# Altium PCB DAPLink.PcbDoc
Units mm, origin at the board's own origin, x right, y up, seen from the top; angles counter-clockwise.
Board outline 42 x 20 mm, 2 copper layers (Top Layer, Bottom Layer); 40 components, 31 nets, 154 pads, 57 vias.
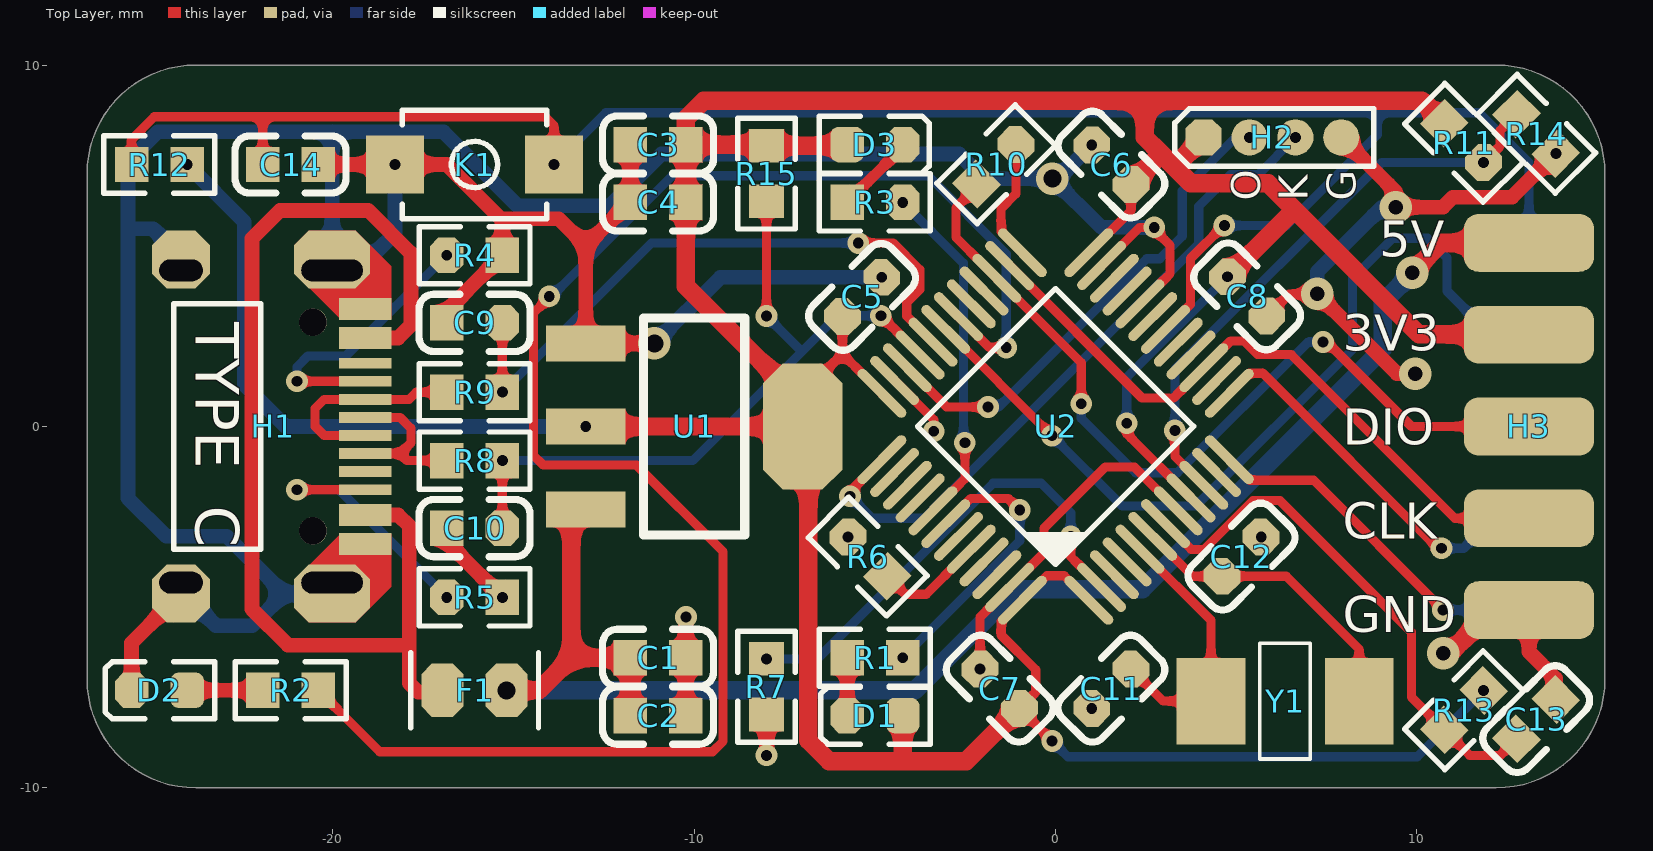
[diagram p0: Top Layer view]
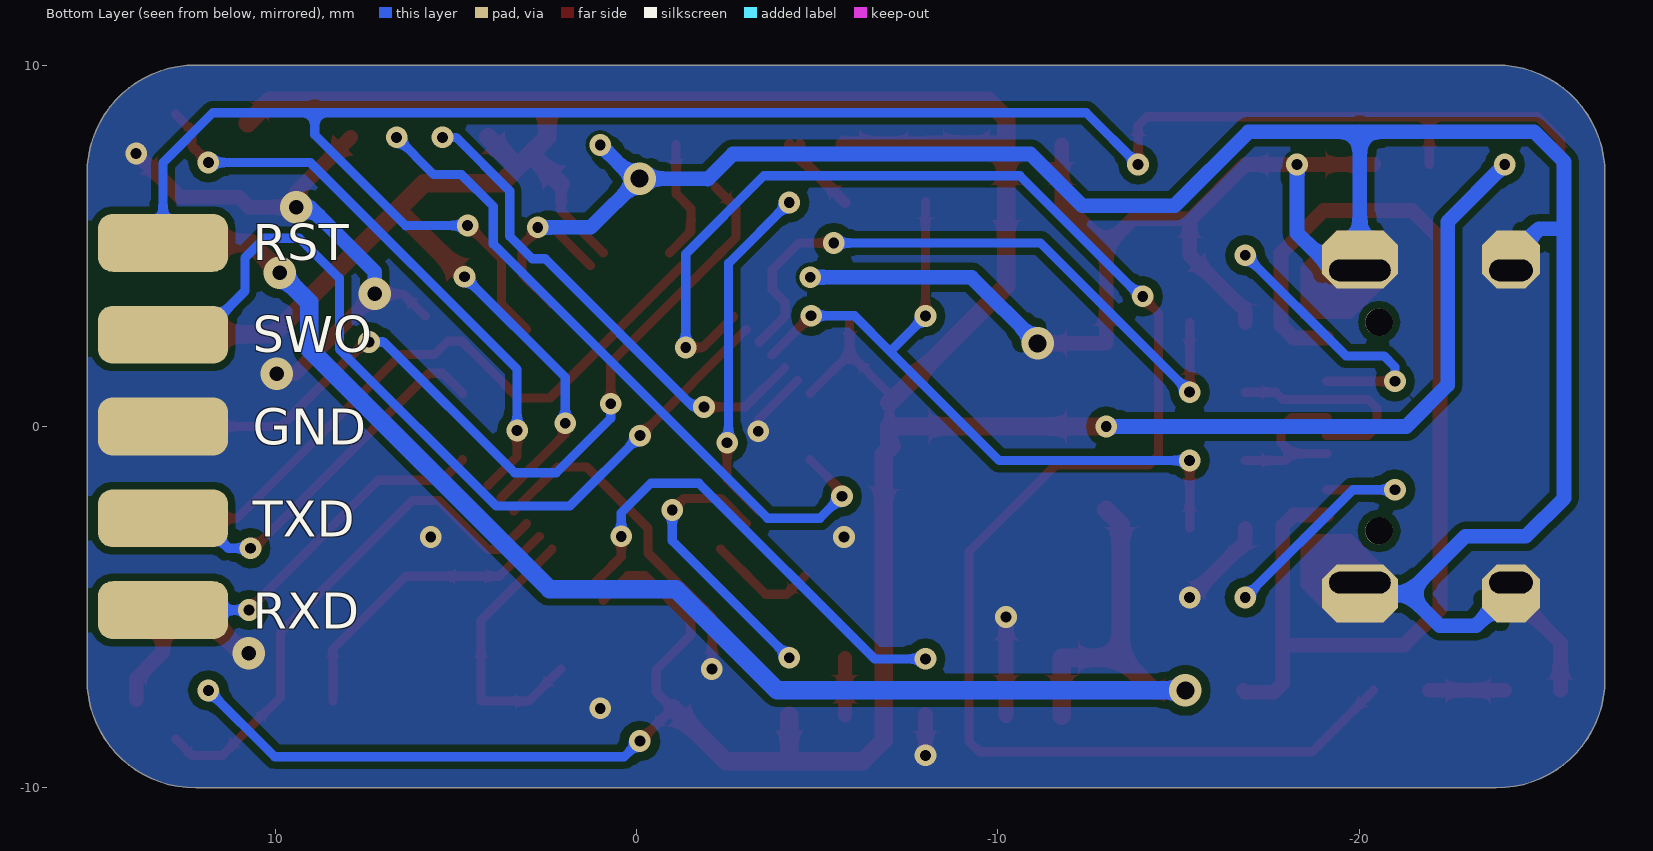
[diagram p1: Bottom Layer view, seen from below]

## Layer stack, top to bottom
Top Solder: solder mask 0.0102, Solder Resist, Dk 3.5
Top Layer: signal copper 0.0356
Dielectric 1: dielectric 0.32, FR-4, Dk 4.8
Bottom Layer: signal copper 0.0356
Bottom Solder: solder mask 0.0102, Solder Resist, Dk 3.5

## Board outline
-26.8,-7 ccw(c-23.8,-7) -23.8,-10 12.2,-10 ccw(c12.2,-7) 15.2,-7 15.2,7 ccw(c12.2,7) 12.2,10 -23.8,10 ccw(c-23.8,7) -26.8,7

## Design rules (kind name [scope] priority, off if disabled: settings)
Clearance [All] p1: gap=0.254 ignorepadtopadclearanceinfootprint=FALSE except(0: Arc-Hole Track-Hole SMDPad-Hole THPad-Hole Via-Hole Fill-Hole Poly-Hole Region-Hole Text-Hole; 0.178: SMDPad-SMDPad; 0.203: Arc-Arc Arc-Track Arc-SMDPad Arc-THPad Arc-Fill Arc-Poly Arc-Region Track-Track Track-SMDPad Track-THPad Track-Fill Track-Poly Track-Region SMDPad-THPad SMDPad-Fill SMDPad-Poly SMDPad-Region THPad-THPad THPad-Fill THPad-Poly THPad-Region)
HoleSize [All] p1: absolutevalues=TRUE maxlimit=100 minlimit=0.025 maxpercent=80.000 minpercent=20.000
PlaneConnect [All] p1: planeconnectstyle=Direct reliefexpansion=0.508 reliefentries=4 reliefconductorwidth=0.254 reliefairgap=0.254
PolygonConnect [All] p1: connectstyle=Direct reliefconductorwidth=0.254 reliefentries=4 polygonreliefangle="90 Angle" airgapwidth=0.254
RoutingVias [All] p1: holewidth=0.3 width=0.6 viastyle="Through Hole" minholewidth=0.3 minwidth=0.6 maxholewidth=10 maxwidth=10
SilkToSilkClearance [All] p1: silktosilkclearance=0
SilkToSolderMaskClearance [IsPad] p1: minsilkscreentomaskgap=0 clearancetoexposedcopper=TRUE
SolderMaskExpansion [All] p1: expansion=0.102
Width [All] p1: maxlimit=100 minlimit=0.254 preferedwidth=0.254 minimp=50.000000 maximp=50.000000 favimp=50.000000
26 further rules are at their usual default settings.

## Components (designator, comment, footprint, x,y, rotation, side; value= is the part's Value field where it differs from the comment)
C1 "10uF" 0603_C#1 -11,-6.4 r180 top
C2 "100nF" 0603_C#1 -11,-8 r180 top
C3 "100nF" 0603_C#1 -11,7.8 r0 top
C4 "10uF" 0603_C#1 -11,6.2 r0 top
C5 "100nF" 0603_C#2 -5.356,3.585 r225 top locked
C6 "100nF" 0603_C#2 1.544,7.246 r315 top locked
C7 "100nF" 0603_C#2 -1.544,-7.256 r315 top locked
C8 "100nF" 0603_C#2 5.3,3.6 r135 top locked
C9 "18pF" 0603_C#3 -16.08,2.868 r0 top locked
C10 "18pF" 0603_C#3 -16.08,-2.812 r0 top locked
C11 "22pF" 0603_C#2 1.544,-7.256 r45 top locked
C12 "22pF" 0603_C#2 5.144,-3.6 r225 top locked
C13 "100nF" 0603_C#1 13.3,-8.1 r225 top
C14 "100nF" 0603_C#1 -21.17,7.25 r180 top
D1 "0603 蓝灯" 0603_LED_BLUE -5,-8 r0 top
D2 "0603 蓝灯" 0603_LED_BLUE -24.8,-7.3 r0 top
D3 "0603 绿灯" 0603_LED_GREEN -5,7.8 r180 top
F1 "1A-6V" 0805_FUSE -16.08,-7.3 r0 top
H1 "USB_TYPEC" USB_TYPEC -26.8,0 r270 top
H2 "PAD4-1.27" HDR4-1.27 6,8 r0 top
H3 "HDR2X5" HDR2X5_2.54_180H 15.2,0 r0 top locked
K1 "BUTTON_MINI" BUTTON_MINI -16.08,7.25 r0 top
R1 "1.5K" 0603_R#1 -5,-6.4 r0 top
R2 "1.5K" 0603_R#1 -21.17,-7.3 r180 top
R3 "1.5K" 0603_R#2 -5,6.2 r0 top
R4 "5.1K" 0603_R#3 -16.08,4.737 r0 top locked
R5 "5.1K" 0603_R#3 -16.08,-4.73 r0 top locked
R6 "100K" 0603_R#2 -5.2,-3.6 r135 top locked
R7 "10K" 0603_R#1 -8,-7.2 r90 top
R8 "33R" 0603_R#1 -16.08,-0.943 r180 top locked
R9 "33R" 0603_R#1 -16.08,0.95 r180 top locked
R10 "100R" 0603_R#3 -1.644,7.256 r225 top locked
R11 "4.7k" 0603_R#3 11.3,7.85 r135 top
R12 "10K" 0603_R#1 -24.8,7.25 r0 top
R13 "100K" 0603_R#1 11.3,-7.85 r45 top
R14 "4.7k" 0603_R#1 13.3,8.1 r135 top
R15 "1K5" 0603_R#1 -8,7 r90 top
U1 "TLV1117LV33DCYR" SOT-223 -10,0 r180 top locked
U2 "STM32F103CBT6" LQFP-48_7x7x05P 0,0 r45 top locked
Y1 "8MHz ±20ppm 20pF" SMD-5032_2P 6.35,-7.6 r0 top

## Footprints (in the part's own frame and the unit in brackets; to place one, negate y for a bottom-side part, rotate by r counter-clockwise, add the part's x,y. Pads: shape width x height; smd on the part's side, far side on the other; paste and mask are expansions set on the pad)
0603_C#1 [mm]
  rect 0.93x0.98 smd: 1(-0.77,0) 2(0.77,0)
  silkscreen extent -1.53,-0.79 1.54,0.79, body extent -0.8,-0.4 0.8,0.4, height 0.3
0603_C#2 [mm]
  oct 0.93x0.98 smd: 1(-0.77,0) 2(0.77,0)
  silkscreen extent -1.53,-0.79 1.54,0.79, body extent -0.8,-0.4 0.8,0.4, height 0.3
0603_C#3 [mm]
  rect 0.93x0.98 smd: 1(-0.77,0)
  oct 0.93x0.98 smd: 2(0.77,0)
  silkscreen extent -1.53,-0.79 1.54,0.79, body extent -0.8,-0.4 0.8,0.4, height 0.3
0603_LED_BLUE [mm]
  rrect50% 0.93x0.98 smd: A(0.77,0)
  oct 0.93x0.98 smd: K(-0.77,0)
  silkscreen extent -1.5,-0.79 1.54,0.79, body extent -0.8,-0.4 0.8,0.4, height 0.6
0603_LED_GREEN [mm]
  rrect50% 0.93x0.98 smd: A(0.77,0)
  oct 0.93x0.98 smd: K(-0.77,0)
  silkscreen extent -1.5,-0.79 1.54,0.79, body extent -0.8,-0.4 0.8,0.4, height 0.6
0603_R#1 [mm]
  rect 0.93x0.98 smd: 1(-0.77,0) 2(0.77,0)
  silkscreen extent -1.53,-0.79 1.54,0.79, body extent -0.85,-0.4 0.85,0.4, height 0.56
0603_R#2 [mm]
  rect 0.93x0.98 smd: 1(-0.77,0)
  oct 0.93x0.98 smd: 2(0.77,0)
  silkscreen extent -1.53,-0.79 1.54,0.79, body extent -0.85,-0.4 0.85,0.4, height 0.56
0603_R#3 [mm]
  oct 0.93x0.98 smd: 1(-0.77,0)
  rect 0.93x0.98 smd: 2(0.77,0)
  silkscreen extent -1.53,-0.79 1.54,0.79, body extent -0.85,-0.4 0.85,0.4, height 0.56
0805_FUSE [mm]
  oct 1.16x1.47 smd: 1(-0.89,0) 2(0.89,0)
  silkscreen extent -1.77,-1.04 1.77,1.03, body extent -1,-0.62 1,0.63, height 0.49
BUTTON_MINI [mm] "龟仔 按键"
  rect 1.6x1.6 smd: 1(-2.2,0) 2(2.2,0)
  silkscreen extent -2,-1.5 2,1.5, body extent -2,-1.5 2,1.5, height 1.8
HDR2X5_2.54_180H [mm] "JOB"
  rrect50% 3.6x1.6 smd: 1(-2.1,5.08) 2(-2.1,2.54) 3(-2.1,0) 4(-2.1,-2.54) 5(-2.1,-5.08)
  rrect50% 3.6x1.6 smd far side: 6(-2.1,-5.08) 7(-2.1,-2.54) 8(-2.1,0) 9(-2.1,2.54) 10(-2.1,5.08)
  body extent -3.39,-6.35 9.3,6.35, height 2.54
HDR4-1.27 [mm]
  oct 1x1 smd: 1(-1.905,0)
  round 1 smd: 2(-0.635,0) 3(0.635,0) 4(1.905,0)
  silkscreen extent -2.7,-0.8 2.8,0.8, body extent -2.3,-0.4 2.31,0.4, height 0.1
LQFP-48_7x7x05P [mm]
  oval 0.28x1.8 smd mask+0.051: 1(-2.75,-4.05) 2(-2.25,-4.05) 3(-1.75,-4.05) 4(-1.25,-4.05) 5(-0.75,-4.05) 6(-0.25,-4.05) 7(0.25,-4.05) 8(0.75,-4.05) 9(1.25,-4.05) 10(1.75,-4.05) 11(2.25,-4.05) 12(2.75,-4.05) 25(2.75,4.05) 26(2.25,4.05) 27(1.75,4.05) 28(1.25,4.05) 29(0.75,4.05) 30(0.25,4.05) 31(-0.25,4.05) 32(-0.75,4.05) 33(-1.25,4.05) 34(-1.75,4.05) 35(-2.25,4.05) 36(-2.75,4.05)
  oval 1.8x0.28 smd mask+0.051: 13(4.05,-2.75) 14(4.05,-2.25) 15(4.05,-1.75) 16(4.05,-1.25) 17(4.05,-0.75) 18(4.05,-0.25) 19(4.05,0.25) 20(4.05,0.75) 21(4.05,1.25) 22(4.05,1.75) 23(4.05,2.25) 24(4.05,2.75) 37(-4.05,2.75) 38(-4.05,2.25) 39(-4.05,1.75) 40(-4.05,1.25) 41(-4.05,0.75) 42(-4.05,0.25) 43(-4.05,-0.25) 44(-4.05,-0.75) 45(-4.05,-1.25) 46(-4.05,-1.75) 47(-4.05,-2.25) 48(-4.05,-2.75)
  silkscreen extent -2.7,-2.7 2.7,2.7, body extent -4.5,-4.5 4.5,4.5, height 1.6
SMD-5032_2P [mm]
  rect 1.9x2.4 smd: 1(-2.05,0) 2(2.05,0)
  silkscreen extent -0.7,-1.6 0.7,1.6, body extent -2.5,-1.6 2.5,1.6, height 1.3
SOT-223 [mm]
  rect 2.2x1 smd: 1(3,-2.3) 2(3,0) 3(3,2.3)
  oct 2.2x3.5 smd: 2(-3,0)
  silkscreen extent -1.4,-3 1.4,3, body extent -3.49,-3.24 3.49,3.24, height 1.64
USB_TYPEC [mm]
  oct 1.6x2.1 hole 0.6 slot 1.7 at 90 deg copper offset -0.3,0: 0(-4.32,6.78)
  oct 1.6x1.6 hole 0.6 slot 1.2 at 90 deg copper offset -0.3,0: 0(-4.32,2.6)
  oct 1.6x2.1 hole 0.6 slot 1.7 at 90 deg copper offset 0.3,0: 0(4.32,6.78)
  oct 1.6x1.6 hole 0.6 slot 1.2 at 90 deg copper offset 0.3,0: 0(4.32,2.6)
  round 0.76 hole 0.76 unplated: 1(-2.89,6.25) 1(2.89,6.25)
  rect 0.6x1.45 smd: A1(-3.25,7.695) A4(-2.45,7.695) A9(2.45,7.695) A12(3.25,7.695)
  rect 0.3x1.45 smd: A5(-1.25,7.695) A6(-0.25,7.695) A7(0.25,7.695) A8(1.25,7.695) B5(1.75,7.695) B6(0.75,7.695) B7(-0.75,7.695) B8(-1.75,7.695)
  silkscreen extent -3.4,2.4 3.4,4.8, body extent -4.47,0 4.47,7.9, height 3.18

## Part data
C1 C4: library part CAP-0603, "0603贴片电容 10UF(106) ±20% 25V", Package=0402, SuppliersPartNumber=C1569, ComponentLink1Description=供应, ComponentLink1URL=http://www.szlcsc.com/product/details_1921.html, Supplier=LC
C2 C3 C5 C6 C7 C8 C13 C14: library part CAP-0603, "0603贴片电容 100NF (104) ±10% 50V X7R", Package=0402, SuppliersPartNumber=C1569, ComponentLink1Description=供应, ComponentLink1URL=http://www.szlcsc.com/product/details_1921.html, Supplier=LC
C9 C10: library part CAP-0603, "0603贴片电容 18PF (180) ±5% 50V C0G", Package=0402, SuppliersPartNumber=C1569, ComponentLink1Description=供应, ComponentLink1URL=http://www.szlcsc.com/product/details_1921.html, Supplier=LC
C11 C12: library part CAP-0603, "0603 贴片电容 22PF (220) ±5% 50V C0G", Package=0402, SuppliersPartNumber=C1569, ComponentLink1Description=供应, ComponentLink1URL=http://www.szlcsc.com/product/details_1921.html, Supplier=LC
D1 D2: "发光二极管", Package=0603, SuppliersPartNumber=C72041, ComponentLink1Description=供应, ComponentLink1URL=http://www.szlcsc.com/product/details_73150.html, Supplier=LC
D3: "发光二极管", Package=0603, SuppliersPartNumber=C72043, ComponentLink1Description=供应, ComponentLink1URL=http://www.szlcsc.com/product/details_73152.html, Supplier=LC
F1: library part FUSE-0805, "0805 1A 6V自恢复保险丝 SMD0805-100"
H3: library part HDR2X5_2.54_180H, "2.54双排排针"
K1: "微动按键 龟仔"
R1 R2 R3 R4 R5 R6 R7 R8 R9 R10 R11 R12 R13 R14 R15: library part RES-0603
U1: "低压差线性稳压(LDO)", Package=SOT-223, SuppliersPartNumber=C6186, ComponentLink1Description=供应, ComponentLink1URL=http://www.szlcsc.com/product/details_6652.html, Supplier=LC
U2: "STM32F103CBT6   LQFP-48"
Y1: library part "SMD-5032_2P 8MHz 20ppm 20pF", "5032贴片晶振，8MHz 20pF", Package=SMD-5032_2P, SuppliersPartNumber=C115962, ComponentLink1Description=供应, ComponentLink1URL=http://www.szlcsc.com/product/details_117214.html, Supplier=LC

## Via types
v1: diameter 0.6, hole 0.3, Top Layer to Bottom Layer, 49 vias
v2: diameter 0.9, hole 0.4, Top Layer to Bottom Layer, 5 vias
v3: diameter 0.9, hole 0.5, Top Layer to Bottom Layer, 3 vias

## Nets (pads, with @x,y where several pads share a name; then routed paths per layer and width w, separated by ;. In a path a pad name is that pad's centre, name@x,y a point inside that pad or via, vN(x,y) a via of type N, cw(c..) or ccw(c..) an arc to the next point about the centre after c; other vN are vias at no path point)
3V3: C3.2 C4.2 C5.2 C6.2 C7.2 C8.2 D1.A D3.A H2.1 H3.2 R11.2 R12.2 R13.2 R15.2 U1.2 U2.1 U2.9 U2.24 U2.36 U2.48 | length 129.2
  Top Layer w0.254: U1.2@-7,0 U1.2@-7,0.58 ; U1.2@-7,0.65 -7,0.911 -5.9,2.011 ; C5.2 -5.9,2.011 ; U2.36 -5.9,2.011 ; v1(-0.095,-8.705) C7.2 -0.55,-7.35 -0.55,-6.73 -1.51,-5.77 -1.51,-5.399 U2.48 -0.241,-4.13 0.241,-4.13 U2.1 ; U2.24 2.089,5.978 C6.2 ; v1(1.97,0.09) 1.97,-0.202 U2.9
  Top Layer w0.406: C7.2@-1.006,-7.794 C7.2
  Top Layer w0.508: v1(-13,0) -7,0 -7,-0.47 -7.07,-0.54 -6.84,-0.77 -6.84,-8.69 -6.27,-9.26 -4.27,-9.26 ; U1.2@-7,0.65 -10.23,3.88 C4.2 C3.2 ; D3.A -5.8,7.77 R15.2 -8.03,7.8 C3.2 ; D1.A -4.23,-9.22 -4.27,-9.26 ; C7.2@-1.006,-7.794 -2.472,-9.26 -4.27,-9.26 ; C6.2 2.882,7.495 2.882,7.588 ; H2.1 3.295,7.2 3.295,7.175 ; v1(4.756,4.144) 6.605,5.994 6.605,6.005 ; R11.2 10.14,9.01 2.47,9.01 ; H3.2 13.09,2.55 10.06,2.55 6.605,6.005 ; C3.2 -10.23,8.52 -9.74,9.01 2.47,9.01 ; 2.47,9.01 2.47,8 2.882,7.588 ; 2.882,7.588 3.295,7.175 ; 3.295,7.175 3.74,6.73 5.88,6.73 6.605,6.005
  Bottom Layer w0.254: v1(-0.095,-8.705) 0.34,-9.14 10.01,-9.14 v1(11.844,-7.306) ; v1(1.97,0.09) 1.97,1.359 v1(4.756,4.144)
  Bottom Layer w0.406: v1(-24.03,7.25) -22.45,5.67 -22.45,1.15 -21.3,0 v1(-13,0)
5V: C1.2 C2.2 F1.2 H3.1 U1.3 | length 43.8
  Top Layer w0.508: v3(-15.19,-7.3) -14.3,-7.3 -13.4,-6.4 ; U1.3 -13.4,-2.7 -13.4,-6.4 ; C2.2 C1.2 -13.4,-6.4 ; v2(9.87,4.25) 9.87,4.27 10.68,5.08 H3.1
  Bottom Layer w0.508: v3(-15.19,-7.3) -3.89,-7.3 -1.09,-4.5 2.406,-4.5 9.054,2.148 9.054,3.434 v2(9.87,4.25)
GND: C1.1 C2.1 C3.1 C4.1 C5.1 C6.1 C7.1 C8.1 C9.1 C10.1 C11.1 C12.1 C13.1 C14.1 D2.K H1.0 H1.A1 H1.A12 H2.4 H3.5 H3.8 K1.1 R4.2 R5.2 R6.2 R7.1 R14.1 U1.1 U2.8 U2.20 U2.23 U2.35 U2.47 | length 137.4
  Top Layer w0.254: U2.35 -3.37,0.188 v1(-3.37,-0.13) ; v1(-2.089,-6.711) -2.089,-5.271 U2.47 -0.32,-3.502 -0.32,-2.817 1.377,-1.12 2.181,-1.12 U2.8 ; U2.23 2.328,5.51 v1(2.73,5.51) 2.73,5.45 3.17,5.01 3.17,4.231 U2.20 ; C8.1 6.459,3.67 v2(7.24,3.67)
  Top Layer w0.406: D2.K -25.57,-5.99 -24.2,-4.62 H1.0@-24.2,-4.32 ; C14.1 v1(-18.28,7.25) -16.85,7.25 -15.31,5.71 ; C10.1 -16.85,-3.19 v1(-15.31,-4.73) ; C9.1 -16.85,3.197 R4.2 -15.31,5.71 ; C3.1 C4.1 -11.8,6.2 -13,5 ; v3(-11.1,2.3) U1.1 -13,5 ; C2.1 C1.1 v1(-10.23,-5.27) ; v1(-8,-9.1) R7.1 ; v2(7.24,3.67) 9.45,1.46 v2(9.95,1.46) ; H2.4 9.41,6.495 v2(9.41,6.07) 10.72,6.07 10.99,6.34 12.629,6.34 v1(13.844,7.556) ; H3.5 13.1,-6.23 13.844,-6.974 C13.1 ; -15.31,5.71 -15.27,5.75 -13.75,5.75 -13,5
  Top Layer w0.508: v2(10.73,-6.27) 10.9,-6.27 12.09,-5.08 H3.5
  Bottom Layer w0.406: H1.0@-24.2,-4.32 -24.2,-4.55 -23.24,-5.51 -22.23,-5.51 -21.35,-4.63 ; H1.0@-24.2,4.32 -24.2,4.7 -24.97,5.47 -25.59,5.47 -25.67,5.55 ; H1.0@-20.02,-4.32 -20.33,-4.63 -21.35,-4.63 ; v1(-18.28,7.25) -18.28,5.35 -19.31,4.32 -20.02,4.32 -20.02,8.16 ; v3(-11.1,2.3) -9.27,4.13 v1(-4.811,4.13) ; v1(1,7.79) 0.07,6.86 v3(-0.09,6.86) ; v1(2.73,5.51) 1.26,5.51 v3(-0.09,6.86) ; v2(7.24,3.67) 7.24,4.28 9.03,6.07 v2(9.41,6.07) ; -25.67,5.55 -25.67,7.33 -24.84,8.16 -20.02,8.16 ; -25.67,5.55 -25.67,-1.98 -24.61,-3.04 -22.94,-3.04 -21.35,-4.63 ; -20.02,8.16 -16.94,8.16 -14.89,6.11 -12.337,6.11 -10.907,7.54 -2.67,7.54 -1.97,6.84 -1.95,6.86 v3(-0.09,6.86)
  other v1: 1,-7.8 -5.744,-3.056 5.689,-3.056
IF_NRESET: C13.2 R13.1 U2.7 | length 14.7
  Top Layer w0.254: U2.7 3.754,-3.4 4.11,-3.4 5.46,-2.05 6.21,-2.05 9.85,-5.69 9.85,-7.489 R13.1 11.461,-9.1 12.3,-9.1 C13.2
IF_SWCLK: H2.3 U2.37 | length 19.1
  Top Layer w0.254: v1@-5.82,-1.931 v1(-5.687,-1.931) -5.687,-1.798 U2.37
  Bottom Layer w0.254: v1(-5.687,-1.931) -5.078,-2.54 -3.63,-2.54 3.962,5.052 3.962,6.092 4.84,6.97 5.605,6.97 v1(6.635,8)
IF_SWDIO: H2.2 U2.34 | length 13.7
  Top Layer w0.254: U2.34 -3.015,0.54 v1(-1.87,0.54)
  Bottom Layer w0.254: v1(-1.87,0.54) -1.578,0.54 2.522,4.64 2.88,4.64 3.505,5.265 3.505,6.516 4.988,8 v1(5.365,8)
LED_COM_GRN: R3.2 U2.41 | length 9.6
  Top Layer w0.254: U2.41 -2.73,-1.669 -2.51,-1.449 v1(-2.51,-0.45)
  Bottom Layer w0.254: v1(-4.23,6.2) -2.551,4.521 -2.551,-0.409 v1(-2.51,-0.45)
LED_DAP_BLUE: R1.2 U2.42 | length 7.9
  Top Layer w0.254: U2.42 -2.344,-1.99 -1.31,-1.99 v1(-0.99,-2.31)
  Bottom Layer w0.254: v1(-4.23,-6.4) -0.99,-3.16 v1(-0.99,-2.31)
LED_PWR_RED: R2.1 U2.30 | length 47.5
  Top Layer w0.254: R2.1 -18.7,-9 -9.495,-9 -9.2,-8.705 -9.2,-3.466 -11.6,-1.066 -14.178,-1.066 -14.451,-0.793 -14.451,3.129 -14.01,3.57 v1(-14.01,3.6) ; U2.30 -1.83,2.184 v1(-1.364,2.184)
  Bottom Layer w0.254: v1(-14.01,3.6) -14.01,3.54 -10.613,6.937 -3.527,6.937 -1.364,4.774 v1(-1.364,2.184)
NetC9_2: C9.2 R9.1 U2.32 | length 17.9
  Top Layer w0.254: v1(-15.31,0.95) C9.2 ; v1(-5.46,5.08) -4.5,5.08 -3.76,4.34 -3.76,3.79 -4.12,3.43 -4.12,3.059 U2.32
  Bottom Layer w0.254: v1(-15.31,0.95) -11.18,5.08 v1(-5.46,5.08)
NetC10_2: C10.2 R8.1 R15.1 U2.33 | length 20.1
  Top Layer w0.254: C10.2 v1(-15.31,-0.943) ; v1(-8,3.056) R15.1 ; v1(-4.835,3.065) -4.832,3.065 U2.33
  Bottom Layer w0.254: v1(-15.31,-0.943) -10.043,-0.943 -7,2.1 ; v1(-8,3.056) -7.044,2.1 -7,2.1 ; v1(-4.835,3.065) -6.035,3.065 -7,2.1
NetD1_K: D1.K R1.1 | length 1.6
  Top Layer w0.381: D1.K R1.1
NetD2_A: D2.A R2.2 | length 2.1
  Top Layer w0.406: D2.A R2.2
NetD3_K: D3.K R3.1 | length 2.3
  Top Layer w0.305: R3.1 -4.23,7.74 D3.K ; D3.K@-4.53,7.74 D3.K@-4.53,7.8
NetF1_1: F1.1 H1.A4 H1.A9 | length 30.6
  Top Layer w0.406: H1.A9 -18.19,-2.45 -17.89,-2.75 -17.89,-6 ; H1.A4 -18.19,2.45 -17.84,2.8 -17.84,4.8 -19.018,5.978 -21.462,5.978 -22.24,5.2 -22.24,-5.05 -21.24,-6.05 -17.94,-6.05 -17.89,-6 ; F1.1@-16.79,-7.3 -16.84,-7.35 -17.64,-7.35 -17.89,-7.1 -17.89,-6
NetH1_A5: H1.A5 R4.1 | length 7.7
  Top Layer w0.254: v1(-20.99,1.25) H1.A5
  Bottom Layer w0.254: v1(-20.99,1.25) -20.99,1.65 -20.69,1.95 -19.64,1.95 -16.853,4.737 v1(-16.85,4.737)
NetH1_B5: H1.B5 R5.1 | length 7.3
  Top Layer w0.254: v1(-20.99,-1.75) H1.B5
  Bottom Layer w0.254: v1(-20.99,-1.75) -19.83,-1.75 v1(-16.85,-4.73)
NetR6_1: R6.1 U2.44 | length 3
  Top Layer w0.254: R6.1 -4.16,-4.64 -3.579,-4.64 U2.44
NetR7_2: R7.2 U2.2 | length 13.2
  Top Layer w0.254: v1(0.42,-3.04) 0.42,-3.602 U2.2
  Bottom Layer w0.254: v1(-8,-6.43) -6.59,-6.43 -1.73,-1.57 -0.402,-1.57 0.42,-2.392 v1(0.42,-3.04)
NetR10_1: R10.1 U2.25 | length 3.4
  Top Layer w0.254: R10.1 -1.1,6.44 -1.51,6.03 -1.51,5.399 U2.25
OSCIN: C11.2 U2.5 Y1.1 | length 7.6
  Top Layer w0.254: C11.2 2.978,-7.6 Y1.1 4.3,-5.361 U2.5
OSCOUT: C12.2 U2.6 Y1.2 | length 8.4
  Top Layer w0.254: U2.6 3.791,-4.144 C12.2 6.384,-4.144 8.4,-6.161 Y1.2
PA0: R11.1 R14.2 U2.10 | length 16.2
  Top Layer w0.254: v1(3.3,-0.11) 3.3,-0.825 U2.10 ; v1(11.844,7.306) 12.3,7.761 12.3,8.189 R14.2
  Bottom Layer w0.254: v1(3.3,-0.11) 3.3,1.58 9.026,7.306 v1(11.844,7.306)
TGT_NRESET: C14.2 H3.10 K1.2 R12.1 U2.18 | length 55
  Top Layer w0.254: R12.1 -25.57,7.94 -24.94,8.57 -21.94,8.57 ; C14.2 -21.94,8.57 ; v1(-13.88,7.25) -13.88,8.32 -14.13,8.57 -21.94,8.57 ; U2.18 3.733,3.379 3.733,4.647 4.646,5.56 v1(4.67,5.56)
  Top Layer w0.381: v1(-13.88,7.25) K1.2@-13.86,7.27
  Bottom Layer w0.254: v1(-13.88,7.25) -12.45,8.68 4.082,8.68 4.083,8.681 8.9,8.681 ; v1(4.67,5.56) 6.381,5.56 6.384,5.557 8.9,8.073 8.9,8.681 ; H3.10 13.1,7.3 11.719,8.681 8.9,8.681
TGT_RX: H3.6 U2.12 | length 10
  Top Layer w0.254: U2.12 5.379,-1.49 7.14,-1.49 10.72,-5.07 v1(10.72,-5.08)
  Bottom Layer w0.254: v1(10.72,-5.08) H3.6
TGT_SWCLK: H3.4 U2.15 U2.26 | length 18.6
  Top Layer w0.254: U2.26 2.392,0.79 3.265,0.79 U2.15 4.845,2.37 5.21,2.37 5.59,1.99 6.52,1.99 11.05,-2.54 H3.4
TGT_SWDIO: H3.3 R10.2 U2.27 | length 23.5
  Top Layer w0.254: R10.2@-2.189,6.621 -2.76,6.05 -2.76,5.235 U2.27 0.71,1.765 v1(0.71,0.63) ; v1(7.4,2.34) 7.51,2.34 9.85,0 H3.3
  Bottom Layer w0.254: v1(0.71,0.63) 0.71,0.23 2.22,-1.28 3.37,-1.28 6.99,2.34 v1(7.4,2.34)
TGT_SWO: H3.9 U2.31 | length 24
  Top Layer w0.254: U2.31 v1(-0.102,-0.252)
  Bottom Layer w0.254: v1(-0.102,-0.252) 1.846,-2.2 3.88,-2.2 8.22,2.14 8.22,4.1 9.33,5.21 10.29,5.21 10.83,4.67 10.83,3.75 12.04,2.54 H3.9
TGT_TX: H3.7 U2.13 | length 10.8
  Top Layer w0.254: U2.13 5.369,1.48 5.73,1.48 v1@10.63,-3.42
  Bottom Layer w0.254: v1(10.68,-3.37) 11.29,-3.37 12.12,-2.54 H3.7
USB_DN: H1.A7 H1.B7 R9.2 | length 5.8
  Top Layer w0.254: H1.A7 -20.24,-0.25 -20.49,0 -20.49,0.5 -20.24,0.75 H1.B7 -17.89,0.75 -17.69,0.95 R9.2
USB_DP: H1.A6 H1.B6 R8.2 | length 4.5
  Top Layer w0.254: H1.B6 -18.14,-0.75 ; H1.A6 -18.14,0.25 -17.84,-0.05 -17.84,-0.45 -18.14,-0.75 ; R8.2 -17.947,-0.943 -18.14,-0.75
pads on no net: H1.1 H1.A8 H1.B8 U2.3 U2.4 U2.11 U2.14 U2.16 U2.17 U2.19 U2.21 U2.22 U2.28 U2.29 U2.38 U2.39 U2.40 U2.43 U2.45 U2.46

## Polygon pours and split planes (outlines as drawn)
GND on Bottom Layer "GND_L02_P000" (solid, remove dead copper, pour order 0): -26.8,-7 -26.8,7 cw(c-23.8,7) -23.8,10 12.2,10 cw(c12.2,7) 15.2,7 15.2,-7 cw(c12.2,-7) 12.2,-10 -23.8,-10 cw(c-23.8,-7)

## Other copper
Top Layer:
  region net GND: -19.79,2.98 -18.38,2.98 -18.38,3.63 -18.38,4.43 -19.37,5.42 -20.67,5.42 -21.07,5.02 -21.07,4.26
  region net GND: -19.79,-2.98 -18.38,-2.98 -18.38,-3.63 -18.38,-4.43 -19.37,-5.42 -20.67,-5.42 -21.07,-5.02 -21.07,-4.26
  region: -16.08,5.765
Bottom Layer:
  region: 12.3,9.1

## Silkscreen, mask and mechanical layers (free items; w line width, h text height)
Top Overlay:
  text "O" at 5.659,6.25 h0.8 r90
  text "K" at 6.979,6.25 h0.8 r90
  text "G" at 8.3,6.25 h0.8 r90
  text "5V" at 8.95,4.7 h1
  text "3V3" at 7.95,2.1 h1
  text "DIO" at 7.95,-0.5 h1
  text "CLK" at 7.95,-3.1 h1
  text "GND" at 7.95,-5.7 h1
Bottom Overlay:
  text "RST" at 10.616,4.6 h1
  text "SWO" at 10.616,2.05 h1
  text "GND" at 10.616,-0.5 h1
  text "TXD" at 10.616,-3.05 h1
  text "RXD" at 10.616,-5.6 h1
Mechanical 1:
  the board outline again, w0.1
Mechanical 15:
  lines w0.15: -26.8,0 15.2,0 ; 0,-9 0,9

## Text inside footprints (layer, text, board x,y; h text height)
H1: Top Overlay "TYPE" at -23.8,2.89 h1.2 r270; Top Overlay "C" at -23.8,-2.2 h1.2 r270